# Altium PCB TC-temp-logger-base.PcbDoc (part 2 of 5)
Units mil, origin at the board's own origin, x right, y up, seen from the top; angles counter-clockwise.
Board outline 6370.08 x 6889.76 mil, 4 copper layers (Top Layer, Layer 2, Layer 1, Bottom Layer), stack 61.581 mil thick; 216 components, 163 nets, 792 pads, 3713 vias.
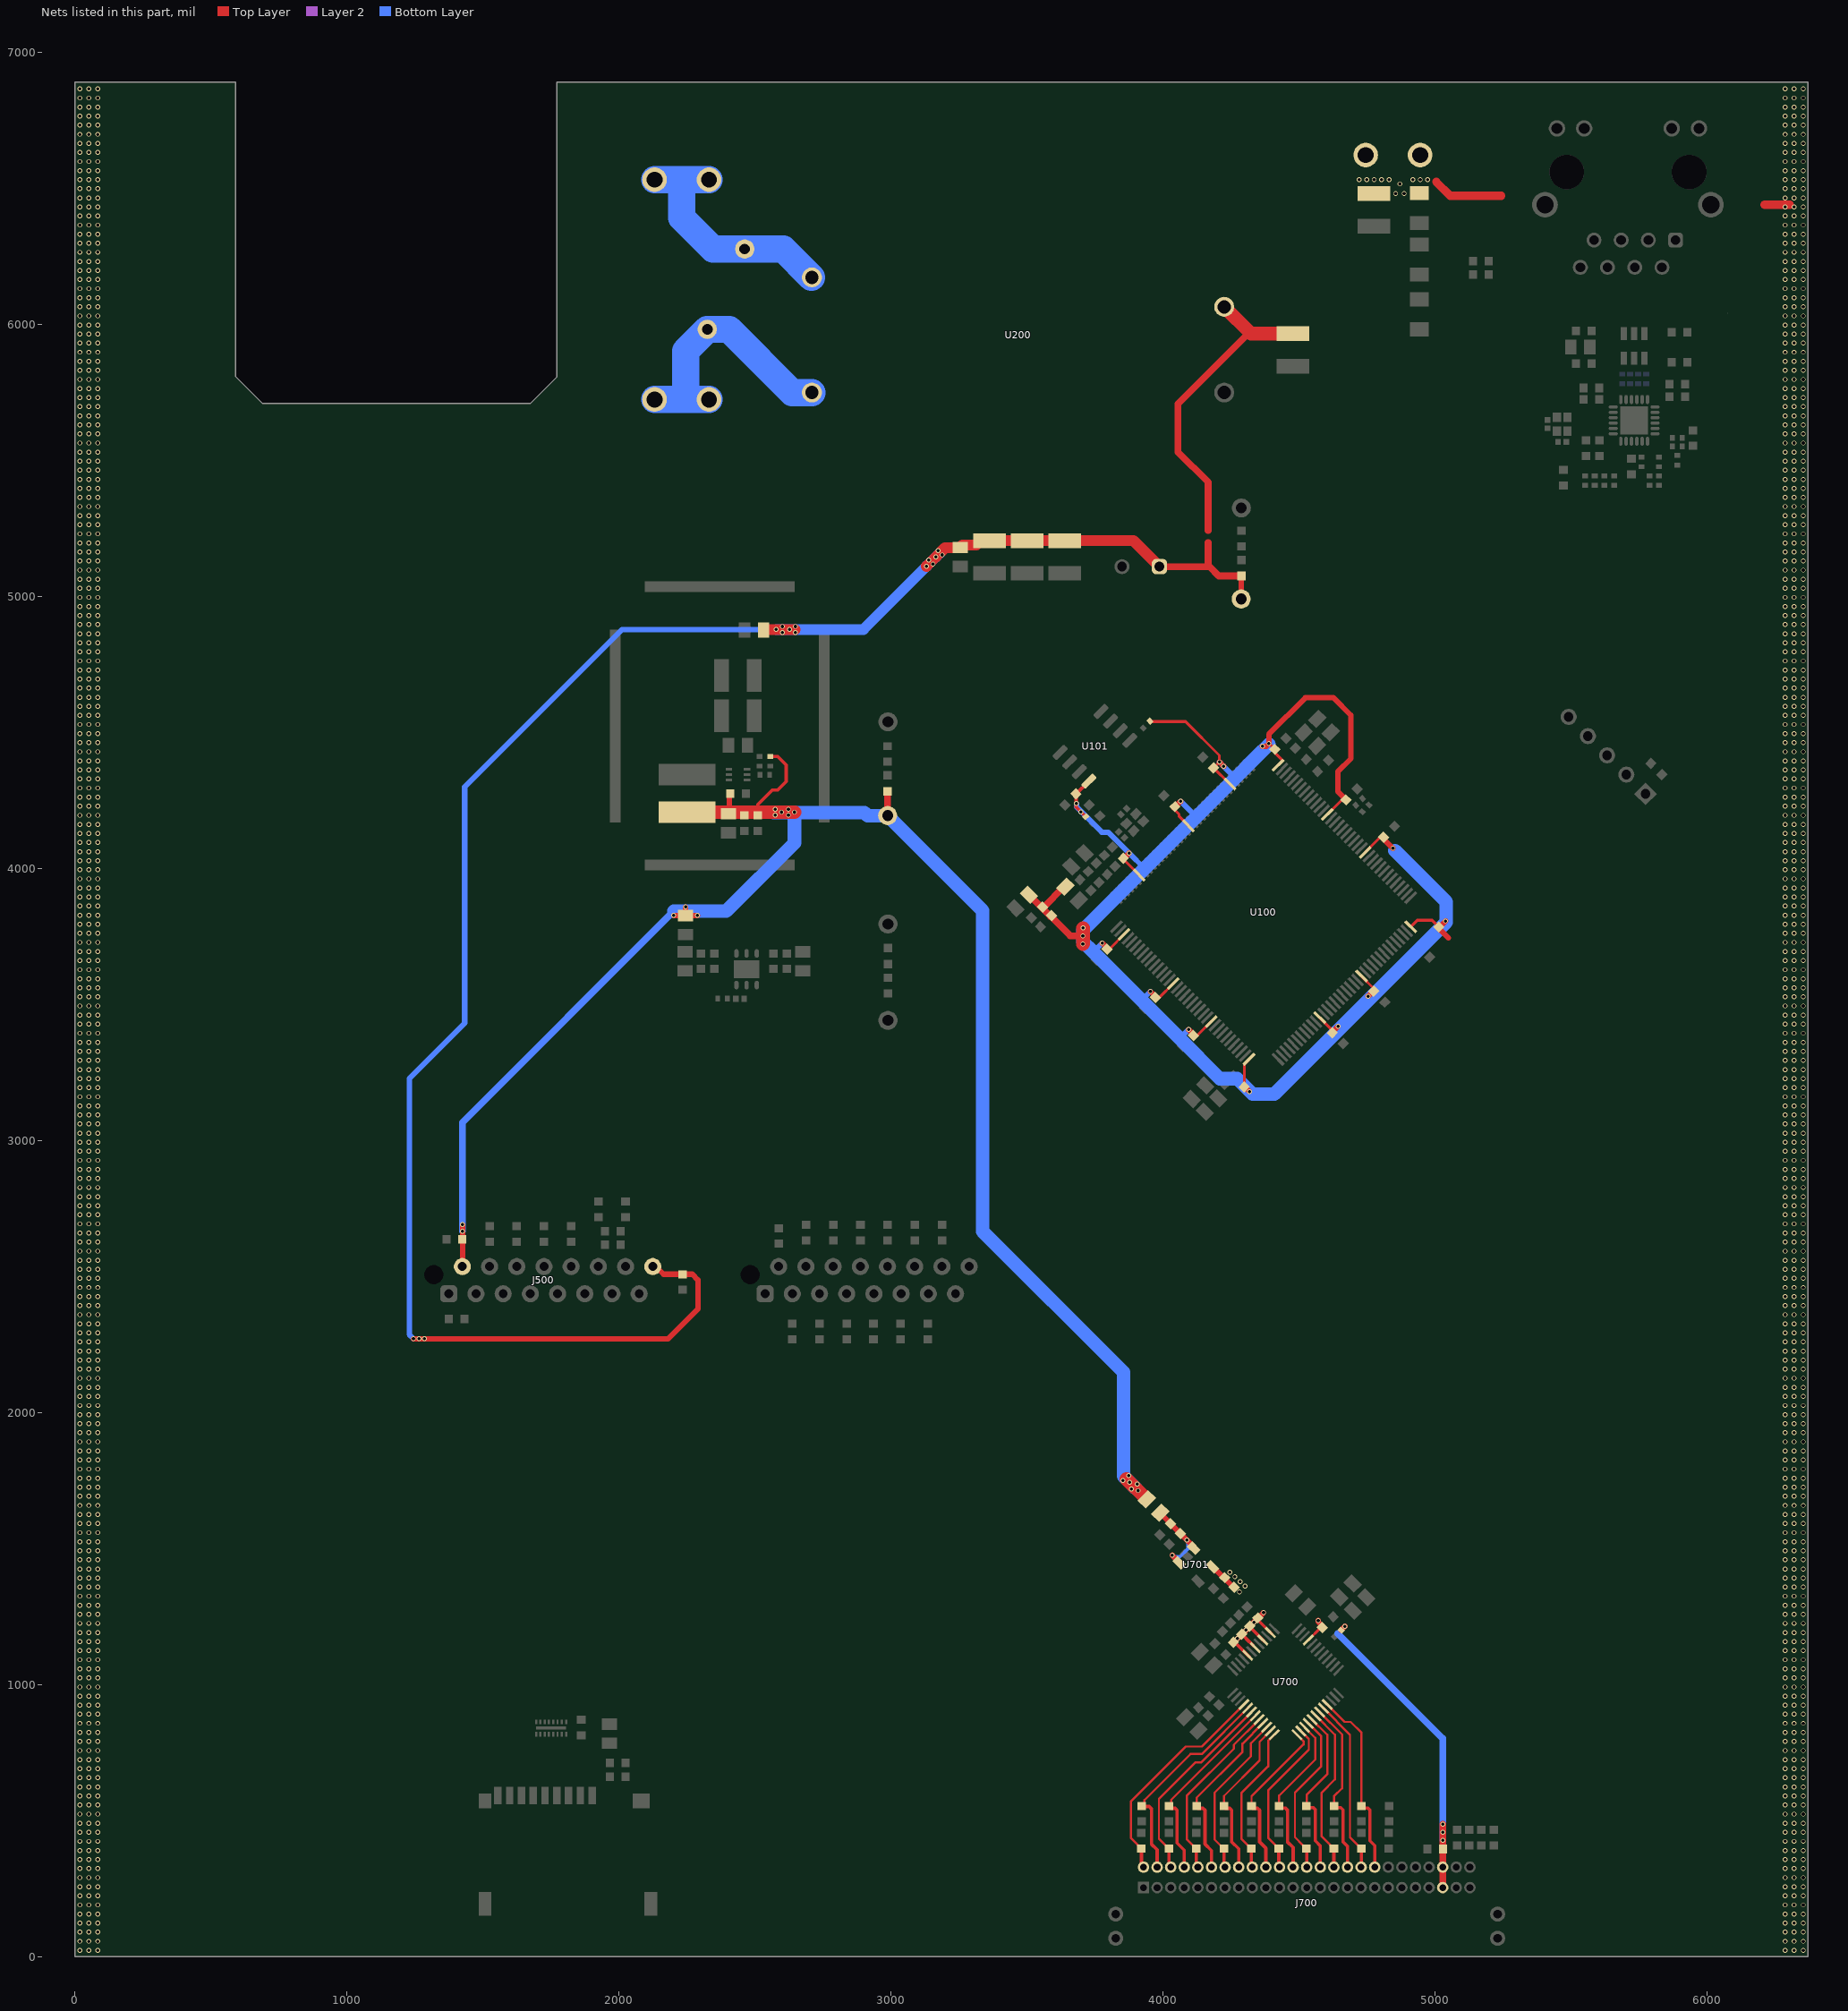
[diagram p4: the nets of this part, all layers, seen from the top]

## Part data
C100 C103 C106 C107 C108 C111 C112 C114 C116 C117 C118 C119 C120 C121 C122 C123 C124 C127 C128 C129 C130 C300 C304 C305 C306 C307 C308 C309 C400 C402 C724 C725 C728 C731 C732 C733 C734: library part C_100nF_50V_X7R_0603_10_AECQ1, "Capacitor", Dielectric=X7R, Manufacturer=Murata, Manufacturer Part Number=GCM188R71H104KA57D, Tolerance (%)=10, Voltage=50V, AEC-Q=1, HelpURL=https://www.murata.com/products/productdetail?partno=GCM188R71H104KA57%23, Part Number=C_100nF_50V_X7R_0603_10_AECQ1, SCH_Footprint=0603, Supplier 1=TME, Supplier 2="RS Components", Supplier 3=Farnell, Supplier 4=Mouser, Supplier 5=Digi-Key, Supplier 6=LCSC, Supplier Part Number 1=GCM188R71H104KA57D, Supplier Part Number 3=4360223, Supplier Part Number 4=81-GCM188R71H104KA7D, Supplier Part Number 5=490-4779-1-ND, Supplier Part Number 6=C85864
C101 C102 C104 C105 C115: library part C_2.2uF_35V_X7S_0805_10_AECQ1, "Capacitor", Dielectric=X7S, Manufacturer=Murata, Manufacturer Part Number=GCM21BC7YA225KE02, Supplier Part Number 1=GCM21BC7YA225KE02L, Tolerance (%)=10, Voltage=35V, AEC-Q=1, HelpURL=https://www.murata.com/products/productdetail?partno=GCM21BC7YA225KE02%23, Part Number=C_2.2uF_35V_X7S_0805_10_AECQ1, SCH_Footprint=0805, Supplier 1=TME, Supplier 2="RS Components", Supplier 3=Farnell, Supplier 4=Mouser, Supplier 5=Digi-Key, Supplier 6=LCSC, Supplier Part Number 3=3784380, Supplier Part Number 4=81-GCM21BC7YA225KE2L, Supplier Part Number 5=490-16390-1-ND, Supplier Part Number 6=C389007
C109 C110 C113 C209 C210 C213 C214 C215 C216 C301 C401 C403 C500 C501 C502 C503 C727 C729 C730 C735 C736: library part C_22uF_10V_X5R_0603_20, "Capacitor", Dielectric=X5R, Manufacturer=Murata, Manufacturer Part Number=GRM188R61A226ME15D, Tolerance (%)=20, Voltage=10V, HelpURL=https://www.mouser.pl/datasheet/2/281/1/GRM188R61A226ME15_02A-1985787.pdf, Part Number=C_22uF_10V_X5R_0603_20, SCH_Footprint=0603, Supplier 1=TME, Supplier 2="RS Components", Supplier 3=Farnell, Supplier 4=Mouser, Supplier 5=Digi-Key, Supplier 6=LCSC, Supplier Part Number 1=GRM188R61A226ME15D, Supplier Part Number 3=2426957, Supplier Part Number 4=81-GRM188R61A226ME5D, Supplier Part Number 5=490-10476-1-ND
C125 C126 C310 C311: library part C_5.6pF_50V_C0G_0402_2_AECQ1, "Capacitor", Dielectric=C0G, Manufacturer=Murata, Manufacturer Part Number=GCM1555C1H5R6BA16D, Tolerance (%)=2, Voltage=50V, AEC-Q=1, HelpURL=https://www.murata.com/products/productdetail?partno=GCM1555C1H5R6BA16%23, Part Number=C_5.6pF_50V_C0G_0402_2_AECQ1, SCH_Footprint=0402, Supplier 1=TME, Supplier 2="RS Components", Supplier 3=Farnell, Supplier 4=Mouser, Supplier 5=Digi-Key, Supplier 6=LCSC, Supplier Part Number 1=GCM1555C1H5R6BA16D, Supplier Part Number 3=3581200, Supplier Part Number 4=81-GCM1555C1H5R6BA6D, Supplier Part Number 5=490-14424-1-ND, Supplier Part Number 6=C415376
C200: library part 860020274017, "WCAP-ATG5 Aluminum Electrolytic Capacitor, Radial, THT, D8 x H20mm, 1500µF, 10V", Capacitance Tolerance=+/-20%, Leakage Current=150µA, Manufacturer="Wurth Elektronik", Operating Temperature Max=105°C, Operating Temperature Min=-40°C, Rated Voltage (DC)=10V, Ripple Current=715mA, Capacitance=1500µF, Category="Aluminum Electrolytic Capacitors", ComponentLink1Description="Website Link", ComponentLink1URL=https://www.we-online.com/redexpert/article/860020274017?ad, ComponentLink2Description="Datasheet Link", ComponentLink2URL=https://www.we-online.com/redexpert/spec/860020274017?ad, Diameter=8mm, Dissipation Factor=17%, Endurance=2000h, Height=20mm, Manufacturer Part Number=860020274017, Match Code=WCAP-ATG5, Mount="Through Hole", Packaging="Ammo Pack", Technical Reference=ATDE200152M010DSPA7B000
C201 C206 C211 C212 C217: library part C_GENERIC_0805, "Capacitor", Tolerance (%)=0, Voltage=0V, Dielectric=-, HelpURL=-, Manufacturer=-, Manufacturer Part Number=-, Part Number=C_GENERIC_0805, SCH_Footprint=0805, Supplier 1=TME, Supplier 2="RS Components", Supplier 3=Farnell, Supplier 4=Mouser, Supplier 5=Digi-Key, Supplier 6=LCSC
C202 C203 C204 C207 C208 C219: library part C_22uF_25V_X7R_1210_20, "Capacitor", Dielectric=X7R, Manufacturer=Murata, Manufacturer Part Number=GRM32ER71E226ME15L, Tolerance (%)=20, Voltage=25V, HelpURL=https://www.murata.com/en-eu/api/pdfdownloadapi?cate=luCeramicCapacitorsSMD&partno=GRM32ER71E226ME15%23, Part Number=C_22uF_25V_X7R_1210_20, SCH_Footprint=1210, Supplier 1=TME, Supplier 2="RS Components", Supplier 3=Farnell, Supplier 4=Mouser, Supplier 5=Digi-Key, Supplier 6=LCSC, Supplier 7="Arrow Electronics", Supplier Part Number 2=8467372P, Supplier Part Number 3=2218912, Supplier Part Number 4=81-GRM32ER71E226ME5L, Supplier Part Number 5=490-10758-1-ND, Supplier Part Number 7=GRM32ER71E226ME15L
C205: library part C_100nF_100V_X7R_0603_10, "Capacitor", Dielectric=X7R, Manufacturer=Kemet, Manufacturer Part Number=C0603X104K1RACTU, Tolerance (%)=10, Voltage=100V, HelpURL=https://www.mouser.pl/datasheet/2/447/KEM_C1013_X7R_FT_CAP_SMD-3316633.pdf, Part Number=C_100nF_100V_X7R_0603_10, SCH_Footprint=0603, Supplier 1=TME, Supplier 2="RS Components", Supplier 3=Farnell, Supplier 4=Mouser, Supplier 5=Digi-Key, Supplier 6=LCSC, Supplier Part Number 3=4380077, Supplier Part Number 4=80-C0603X104K1RACTU, Supplier Part Number 5=399-C0603X104K1RACTUCT-ND
C218: library part C_100nF_10V_X7R_0402_10, "Capacitor", Dielectric=X7R, Manufacturer=Murata, Manufacturer Part Number=GRM155R71A104KA01D, Tolerance (%)=10, Voltage=10V, HelpURL=https://octopart.com/datasheet/grm155r71a104ka01d-murata-6810561, Part Number=C_100nF_10V_X7R_0402_10, SCH_Footprint=0402, Supplier 1=TME, Supplier 2="RS Components", Supplier 3=Farnell, Supplier 4=Mouser, Supplier 5=Digi-Key, Supplier 6=LCSC, Supplier Part Number 1=GRM155R71A104KA01D, Supplier Part Number 3=1828860, Supplier Part Number 4=81-GRM155R71A104KA1D, Supplier Part Number 5=490-6321-1-ND
C302: library part C_470pF_25V_C0G_0603_5, "Capacitor", Dielectric=C0G, Manufacturer="Wurth Elektronik", Manufacturer Part Number=885012006042, Tolerance (%)=5, Voltage=25V, HelpURL=https://www.we-online.com/components/products/datasheet/885012006042.pdf, Part Number=C_470pF_25V_C0G_0603_5, SCH_Footprint=0603, Supplier 1=TME, Supplier 2="RS Components", Supplier 3=Farnell, Supplier 4=Mouser, Supplier 5=Digi-Key, Supplier 6=LCSC, Supplier Part Number 3=2533843, Supplier Part Number 4=710-885012006042, Supplier Part Number 5=732-7784-1-ND
C303: library part C_1uF_16V_X7R_0603_10, "Capacitor", Dielectric=X7R, Manufacturer="Wurth Elektronik", Manufacturer Part Number=885012206052, Tolerance (%)=10, Voltage=16V, HelpURL=https://www.we-online.com/components/products/datasheet/885012206052.pdf, Part Number=C_1uF_16V_X7R_0603_10, SCH_Footprint=0603, Supplier 1=TME, Supplier 2="RS Components", Supplier 3=Farnell, Supplier 4=Mouser, Supplier 5=Digi-Key, Supplier 6=LCSC, Supplier Part Number 2=71070543, Supplier Part Number 3=2495171, Supplier Part Number 4=710-885012206052, Supplier Part Number 5=732-7971-1-ND
C312: library part C_1nF_2kV_X7R_1210_10, "Capacitor", Dielectric=X7R, Manufacturer=AVX, Manufacturer Part Number=1210GC102KAT1A, Tolerance (%)=10, Voltage=2kV, HelpURL=http://www.tme.eu/pl/Document/667fe6e7748c0ed1675574c6bf64b751/AVX_X7R.pdf, Part Number=C_1nF_2kV_X7R_1210_10, SCH_Footprint=1210, Supplier 1=TME, Supplier 2="RS Components", Supplier 3=Farnell, Supplier 4=Mouser, Supplier 5=Digi-Key, Supplier 6=LCSC, Supplier Part Number 1=1210GC102KAT1A
C700 C701 C702 C703 C704 C705 C706 C707 C708 C709 C710 C711 C712 C713 C714 C715 C716 C717 C718 C719: library part C_100pF_100V_C0G_0603_5_AECQ1, "Capacitor", Dielectric=C0G, Manufacturer=Murata, Manufacturer Part Number=GCM1885C2A101JA16D, Tolerance (%)=5, Voltage=100V, AEC-Q=1, HelpURL=https://www.murata.com/products/productdetail?partno=GCM1885C2A101JA16%23, Part Number=C_100pF_100V_C0G_0603_5_AECQ1, SCH_Footprint=0603, Supplier 1=TME, Supplier 2="RS Components", Supplier 3=Farnell, Supplier 4=Mouser, Supplier 5=Digi-Key, Supplier 6=LCSC, Supplier Part Number 1=GCM1885C2A101JA16D, Supplier Part Number 3=2688624, Supplier Part Number 4=81-GCM1885C2A101JA6D, Supplier Part Number 5=490-4771-1-ND, Supplier Part Number 6=C126576
C720 C722 C723 C726: library part C_10uF_16V_X7R_0805_10, "Capacitor", Dielectric=X7R, Manufacturer="Taiyo Yuden", Manufacturer Part Number=EMK212BB7106KG-T, Tolerance (%)=10, Voltage=16V, HelpURL=https://www.mouser.pl/datasheet/2/396/mlcc02_e-1307760.pdf, Part Number=C_10uF_16V_X7R_0805_10, SCH_Footprint=0805, Supplier 1=TME, Supplier 2="RS Components", Supplier 3=Farnell, Supplier 4=Mouser, Supplier 5=Digi-Key, Supplier 6=LCSC, Supplier Part Number 4=963-EMK212BB7106KG-T, Supplier Part Number 5=587-6139-1-ND
C721: library part C_10uF_10V_X5R_0805_10, "Capacitor", Dielectric=X5R, Manufacturer=Kemet, Manufacturer Part Number=C0805C106K8PACTU, Supplier Part Number 1=C0805C106K8PAC, Tolerance (%)=10, Voltage=10V, HelpURL=https://www.mouser.pl/datasheet/2/447/KEM_C1006_X5R_SMD-3316465.pdf, Part Number=C_10uF_10V_X5R_0805_10, SCH_Footprint=0805, Supplier 1=TME, Supplier 2="RS Components", Supplier 3=Farnell, Supplier 4=Mouser, Supplier 5=Digi-Key, Supplier 6=LCSC, Supplier Part Number 2=8029850, Supplier Part Number 3=1463362, Supplier Part Number 4=80-C0805C106K8P, Supplier Part Number 5=399-C0805C106K8PAC7800CT-ND
CON200 CON202 CON300: library part TP_TERMINAL_1-726388-2, "Terminal", Manufacturer="TE Connectivity", Manufacturer Part Number=1-726388-2, HelpURL=https://datasheet.octopart.com/1-726388-2-TE-Connectivity-datasheet-13534909.pdf, Part Number=TP_TERMINAL_1-726388-2, SCH_Footprint=THT, Supplier 1=TME, Supplier 2="RS Components", Supplier 3=Farnell, Supplier 4=Mouser, Supplier 5=Digi-Key, Supplier 6=LCSC, Supplier Part Number 1=1-726388-2, Supplier Part Number 2=6805772, Supplier Part Number 3=2308760, Supplier Part Number 4=571-1-726388-2, Supplier Part Number 5=1-726388-2-ND
D200 D201 D202: library part OL_G_0603_LTST-C193TGKT-5A, "LED GREEN", Manufacturer=Lite-On, Manufacturer Part Number=LTST-C193TGKT-5A, HelpURL=https://pl.mouser.com/datasheet/2/239/Lite-On-LTST-C193TGKT-5A-1175398.pdf, Part Number=OL_G_0603_LTST-C193TGKT-5A, SCH_Footprint=0603, Supplier 1=TME, Supplier 2="RS Components", Supplier 3=Farnell, Supplier 4=Mouser, Supplier 5=Digi-Key, Supplier 6=LCSC, Supplier Part Number 1=LTST-C193TGKT-5A, Supplier Part Number 2=6921063, Supplier Part Number 4=859-LTSTC193TGKT5A, Supplier Part Number 5=160-1832-1-ND
D300: library part CMP-2000-07370-2, "TVS DIODE 5.25V 17V SOT23-6", Breakdown Voltage=6V, Capacitance=3pF, Clamping Voltage=17V, Manufacturer=STMicroelectronics, Max Junction Temp=+125°C, Package=SOT23-6L, Peak Pulse Power=130W, Temperature="-40°C to +125°C", Temperature Range Low=-40°C, Automotive=No, Category=Diode, ComponentLink2Description=Datasheet, ComponentLink2URL=https://upverter.com/datasheet/23dc4ffb028d868909e80577610284b194f13213.pdf, Device Class L1="Circuit Protection", Device Class L2="ESD and Circuit Protection ICs", Device Class L3=unset, Digikey Description="TVS DIODE 5.25V 17V SOT23-6", Direction=Unidirectional, Height=1.45mm, Interface=USB,Ethernet,Other, Lead Free=Yes, Manufacturer Part Number=USBLC6-4SC6, Mouser Description="USBLC6 Series 4 Line 6 V Uni / Bi-Directional ESD Protection - SOT-23-6", Number Of Channels=4, Octopart=https://octopart.com/usblc6-4sc6-stmicroelectronics-347147, RoHS=TRUE, Standoff Height=0mm, Temperature Range High=+125°C
FB100 FB101 FB200 FB201 FB300 FB400 FB700: library part FB_2508051107Y0, "Ferrite Bead", Current=300mA, Manufacturer=Fair-Rite, Manufacturer Part Number=2508051107Y0, Resistance=100mR, HelpURL=https://datasheet.octopart.com/2508051107Y0-Fair-Rite-datasheet-834.pdf, Part Number=FB_2508051107Y0, SCH_Footprint=0805, Supplier 1=TME, Supplier 2="RS Components", Supplier 3=Farnell, Supplier 4=Mouser, Supplier 5=Digi-Key, Supplier 6=LCSC, Supplier Part Number 3=1612004, Supplier Part Number 4=623-2508051107Y0, Supplier Part Number 5=1934-1397-1-ND
FL400: library part CMP-12221-000004-1, "FILTER RC(PI) 45 OHM/20PF SMD", Breakdown Voltage=8V, Capacitance=20pF, Case/Package=QFN, Max Operating Temperature=85°C, Min Operating Temperature=-30°C, Package Quantity=1, Contact Plating=Gold, Depth=1.25mm, ESD Protection=Yes, Height=0.022inch, Lead Free="Lead Free", Length=3.55mm, Max Breakdown Voltage=8V, Mount="Surface Mount", Number Of Channels=6, Number of Pins=16, Packaging="Tape and Reel", Radiation Hardening=No, REACH SVHC="No SVHC", Termination=Flat, Width=0.047inch
J500 J501: library part J_Micro-Match_2x8_THT, "Pin Header", Manufacturer="TE Connectivity", Manufacturer Part Number=1-215079-6, Supplier Part Number 1=AMP-8-215079-6, HelpURL=https://datasheet.octopart.com/1-215079-6-TE-Connectivity-datasheet-11077960.pdf, Part Number=J_Micro-Match_2x8_THT, SCH_Footprint="2x8 1.27mm", Supplier 1=TME, Supplier 2="RS Components", Supplier 3=Farnell, Supplier 4=Mouser, Supplier 5=Digi-Key, Supplier 6=LCSC, Supplier Part Number 2=6804980, Supplier Part Number 3=1772986, Supplier Part Number 4=571-1-215079-6, Supplier Part Number 5=A110872CT-ND
J700: Package=None, Availability=Unavailable, MF=Samtec, MP=TFM-125-01-X-D-RE1-WT, Price=None
JP100 JP200 JP300 JP301 JP302 JP303: library part JP_0603_1608, Manufacturer=-, HelpURL=-, Manufacturer Part Number=-, Part Number=JP_0603_1608, SCH_Footprint=0603, Supplier 1=TME, Supplier 2="RS Components", Supplier 3=Farnell, Supplier 4=Mouser, Supplier 5=Digi-Key, Supplier 6=LCSC
L200: library part 74408942033, "WE-SPC SMT Power Inductor, size 4828, 3.3µH, 2.1A, 0.057Ω", Case/Size Code=4828, DC Resistance=0.0483Ω, DC Resistance Max=0.057Ω, Inductance=3.3µH, Manufacturer="Wurth Elektronik", Operating Temperature Max=125°C, Operating Temperature Min=-40°C, Rated Current=2.1A, Saturation Current=3.5A, Self Resonant Frequency=44MHz, Category="Shielded Power Inductors", ComponentLink1Description="Website Link", ComponentLink1URL=https://www.we-online.com/redexpert/article/74408942033?ad, ComponentLink2Description="Datasheet Link", ComponentLink2URL=https://www.we-online.com/redexpert/spec/74408942033?ad, Height=2.8mm, Length=4.8mm, Manufacturer Part Number=74408942033, Match Code=WE-SPC, Mount="Surface Mount", Packaging="Tape and Reel", Width=4.8mm
MOV200: library part MOV_385VDC_300VAC_THT, "Varistor", Manufacturer=Epcos, Manufacturer Part Number=B72214P2301K103, Voltage=385VDC/300VAC, HelpURL=https://product.tdk.com/en/system/files?file=dam/doc/product/protection/voltage/lead-disk-varistor/data_sheet/70/db/var/siov_leaded_advanced_mp_s14_compact_series.pdf, Part Number=MOV_385VDC_300VAC_THT, SCH_Footprint=7.5x3.5_THT, Supplier 1=TME, Supplier 2="RS Components", Supplier 3=Farnell, Supplier 4=Mouser, Supplier 5=Digi-Key, Supplier 6=LCSC, Supplier Part Number 3=3359824, Supplier Part Number 4=871-B72214P2301K103, Supplier Part Number 5=495-B72214P2301K103-ND
MP200: "WE-SHC Shielding Cabinet, SMT Frame Seamless, Tin Plated, Tray, 26.3x19.8x8.1mm", Manufacturer="Wurth Elektronik", Operating Temperature Max=125°C, Operating Temperature Min=-40°C, Base Material=Steel, Category="EMC Shielding", ComponentLink1Description="Website Link", ComponentLink1URL=https://www.we-online.com/redexpert/article/36702638?ad, ComponentLink2Description="Datasheet Link", ComponentLink2URL=https://www.we-online.com/redexpert/spec/36702638?ad, Height=8.1mm, Length=26.3mm, Manufacturer Part Number=36702638, Match Code=WE-SHC, Mount="Surface Mount", Packaging=Tray, Plating="Tin Plated", Type="SMT Frame Seamless", Width=19.8mm
P100: library part P_HEADER_1x5_2.54, "Pin Header", Manufacturer=Connfly, Manufacturer Part Number=DS1021-1*5SF1-1, Supplier Part Number 1=ZL201-05G, HelpURL=http://datasheet.octopart.com/DS1021-1%2A5SF1-1-Connfly-datasheet-65537859.pdf, Part Number=P_HEADER_1x5_2.54, SCH_Footprint="1x7 2.54mm", Supplier 1=TME, Supplier 2="RS Components", Supplier 3=Farnell, Supplier 4=Mouser, Supplier 5=Digi-Key, Supplier 6=LCSC
R100 R103 R700: library part R_100k_0402_1, Manufacturer=Yageo, Manufacturer Part Number=RC0402FR-07100KL, Power=63mW, Supplier Part Number 1=RC0402FR-07100K, Tolerance=1%, Voltage=50V, HelpURL=http://www.tme.eu/pl/Document/1a2bc76e2be68b3b1670068306778ce6/rc0402yageo.pdf, Part Number=R_100k_0402_1, SCH_Footprint=0402, Supplier 1=TME, Supplier 2="RS Components", Supplier 3=Farnell, Supplier 4=Mouser, Supplier 5=Digi-Key, Supplier 6=LCSC, Supplier Part Number 3=2131798, Supplier Part Number 4=603-RC0402FR-07100KL, Supplier Part Number 5=311-100KLRCT-ND
R101: library part R_47k_0603_1_AECQ0, Manufacturer=Panasonic, Manufacturer Part Number=ERJ-3EKF4702V, Power=100mW, Supplier Part Number 1=ERJ3EKF4702V, Tolerance=1%, Voltage=75V, AEC-Q=0, HelpURL=https://industrial.panasonic.com/cdbs/www-data/pdf/RDA0000/AOA0000C304.pdf, Part Number=R_47k_0603_1_AECQ0, SCH_Footprint=0603, Supplier 1=TME, Supplier 2="RS Components", Supplier 3=Farnell, Supplier 4=Mouser, Supplier 5=Digi-Key, Supplier 6=LCSC, Supplier Part Number 3=2303213, Supplier Part Number 4=667-ERJ-3EKF4702V, Supplier Part Number 5=P47.0KHCT-ND
R102: library part R_47R_0603_1, Manufacturer=Yageo, Manufacturer Part Number=RC0603FR-0747RL, Power=100mW, Tolerance=1%, Voltage=75V, HelpURL=https://datasheet.octopart.com/RC0603FR-0747RL-Yageo-datasheet-8328172.pdf, Part Number=R_47R_0603_1, SCH_Footprint=0603, Supplier 1=TME, Supplier 2="RS Components", Supplier 3=Farnell, Supplier 4=Mouser, Supplier 5=Digi-Key, Supplier 6=LCSC, Supplier Part Number 2=1995582, Supplier Part Number 3=9238328, Supplier Part Number 4=603-RC0603FR-0747RL, Supplier Part Number 5=311-47.0HRCT-ND, Supplier Part Number 6=C114623
R104 R105 R304 R305 R306 R307: library part R_33R_0402_1_AECQ0, Manufacturer=Panasonic, Manufacturer Part Number=ERJ-2RKF33R0X, Power=100mW, Supplier Part Number 1=ERJ2RKF33R0X, Tolerance=1%, Voltage=50V, AEC-Q=0, HelpURL=https://industrial.panasonic.com/cdbs/www-data/pdf/RDA0000/AOA0000C304.pdf, Part Number=R_33R_0402_1_AECQ0, SCH_Footprint=0402, Supplier 1=TME, Supplier 2="RS Components", Supplier 3=Farnell, Supplier 4=Mouser, Supplier 5=Digi-Key, Supplier 6=LCSC, Supplier Part Number 3=2302472, Supplier Part Number 4=667-ERJ-2RKF33R0X, Supplier Part Number 5=P33.0LCT-ND, Supplier Part Number 6=C278594
R200 R201 R202: library part R_1k_0603_1_AECQ0, Manufacturer=Panasonic, Manufacturer Part Number=ERJ-3EKF1001V, Power=100mW, Supplier Part Number 1=ERJ3EKF1001V, Tolerance=1%, Voltage=75V, AEC-Q=0, HelpURL=https://industrial.panasonic.com/cdbs/www-data/pdf/RDA0000/AOA0000C304.pdf, Part Number=R_1k_0603_1_AECQ0, SCH_Footprint=0603, Supplier 1=TME, Supplier 2="RS Components", Supplier 3=Farnell, Supplier 4=Mouser, Supplier 5=Digi-Key, Supplier 6=LCSC, Supplier Part Number 3=2303145, Supplier Part Number 4=667-ERJ-3EKF1001V, Supplier Part Number 5=P1.00KHCT-ND
R203 R205 R206 R308 R309 R310 R311 R314 R317: library part R_10k_0402_1, Manufacturer=Yageo, Manufacturer Part Number=RC0402FR-0710KL, Power=63mW, Supplier Part Number 1=RC0402FR-0710K, Tolerance=1%, Voltage=50V, HelpURL=http://www.tme.eu/pl/Document/1a2bc76e2be68b3b1670068306778ce6/rc0402yageo.pdf, Part Number=R_10k_0402_1, SCH_Footprint=0402, Supplier 1=TME, Supplier 2="RS Components", Supplier 3=Farnell, Supplier 4=Mouser, Supplier 5=Digi-Key, Supplier 6=LCSC
R204: library part R_36k_0402_1_AECQ0, Manufacturer=Panasonic, Manufacturer Part Number=ERJ-2RKF3602X, Power=100mW, Supplier Part Number 1=ERJ2RKF3602X, Tolerance=1%, Voltage=50V, AEC-Q=0, HelpURL=https://industrial.panasonic.com/cdbs/www-data/pdf/RDA0000/AOA0000C304.pdf, Part Number=R_36k_0402_1_AECQ0, SCH_Footprint=0402, Supplier 1=TME, Supplier 2="RS Components", Supplier 3=Farnell, Supplier 4=Mouser, Supplier 5=Digi-Key, Supplier 6=LCSC, Supplier Part Number 3=2302794, Supplier Part Number 4=667-ERJ-2RKF3602X, Supplier Part Number 5=P36.0KLCT-ND, Supplier Part Number 6=C409031
R300 R301 R302 R303: library part R_51R_0402_1_AECQ0, Manufacturer=Panasonic, Manufacturer Part Number=ERJ-2RKF51R0X, Power=100mW, Supplier Part Number 1=ERJ2RKF51R0X, Tolerance=1%, Voltage=50V, AEC-Q=0, HelpURL=https://industrial.panasonic.com/cdbs/www-data/pdf/RDA0000/AOA0000C304.pdf, Part Number=R_51R_0402_1_AECQ0, SCH_Footprint=0402, Supplier 1=TME, Supplier 2="RS Components", Supplier 3=Farnell, Supplier 4=Mouser, Supplier 5=Digi-Key, Supplier 6=LCSC, Supplier Part Number 3=2302492, Supplier Part Number 4=667-ERJ-2RKF51R0X, Supplier Part Number 5=P51.0LCT-ND
R312 R313: library part R_470R_0603_1, Manufacturer=Yageo, Manufacturer Part Number=RC0603FR-07470RL, Power=100mW, Supplier Part Number 1=RC0603FR-07470R, Tolerance=1%, Voltage=50V, HelpURL=http://www.tme.eu/en/Document/9fef8ccbb584e9f6a1c931cf356afd5c/PYu-RC0603_51_RoHS_L_4.pdf, Part Number=R_470R_0603_1, SCH_Footprint=0603, Supplier 1=TME, Supplier 2="RS Components", Supplier 3=Farnell, Supplier 4=Mouser, Supplier 5=Digi-Key, Supplier 6=LCSC, Supplier Part Number 3=9238441, Supplier Part Number 4=603-RC0603FR-07470RL, Supplier Part Number 5=311-470HRCT-ND
R315: library part R_1.5k_0402_1_AECQ0, Manufacturer=Panasonic, Manufacturer Part Number=ERJ-2RKF1501X, Power=100mW, Supplier Part Number 1=ERJ2RKF1501X, Tolerance=1%, Voltage=50V, AEC-Q=0, HelpURL=https://industrial.panasonic.com/cdbs/www-data/pdf/RDA0000/AOA0000C304.pdf, Part Number=R_1.5k_0402_1_AECQ0, SCH_Footprint=0402, Supplier 1=TME, Supplier 2="RS Components", Supplier 3=Farnell, Supplier 4=Mouser, Supplier 5=Digi-Key, Supplier 6=LCSC, Supplier Part Number 3=2302656, Supplier Part Number 4=667-ERJ-2RKF1501X, Supplier Part Number 5=P1.50KLCT-ND
R316: library part R_2.2k_0603_1, Manufacturer=Yageo, Manufacturer Part Number=RC0603FR-072K2L, Power=100mW, Supplier Part Number 1=RC0603FR-072K2, Tolerance=1%, Voltage=50V, HelpURL=https://datasheet.octopart.com/RC0603FR-072K2L-Yageo-datasheet-8328172.pdf, Part Number=R_2.2k_0603_1, SCH_Footprint=0603, Supplier 1=TME, Supplier 2="RS Components", Supplier 3=Farnell, Supplier 4=Mouser, Supplier 5=Digi-Key, Supplier 6=LCSC, Supplier Part Number 3=9238522, Supplier Part Number 4=603-RC0603FR-072K2L, Supplier Part Number 5=311-2.20KHRCT-ND
R318: library part R_12k_0603_1, Manufacturer=Yageo, Manufacturer Part Number=RC0603FR-0712KL, Power=100mW, Supplier Part Number 1=RC0603FR-0712K, Tolerance=1%, Voltage=50V, HelpURL=http://www.tme.eu/pl/Document/d2a72e545e5c8eb7bf2a04fa97535928/rc0603yageo.pdf, Part Number=R_12k_0603_1, SCH_Footprint=0603, Supplier 1=TME, Supplier 2="RS Components", Supplier 3=Farnell, Supplier 4=Mouser, Supplier 5=Digi-Key, Supplier 6=LCSC, Supplier Part Number 3=2693657, Supplier Part Number 4=603-RC0603FR-0712KL, Supplier Part Number 5=311-12.0KHRCT-ND
R319 R320 R321: library part R_330k_1206_1, Manufacturer=Yageo, Manufacturer Part Number=RC1206FR-07330KL, Power=250mW, Tolerance=1%, Voltage=200V, HelpURL=https://datasheet.octopart.com/RC1206FR-07330KL-Yageo-datasheet-8359522.pdf, Part Number=R_330k_1206_1, SCH_Footprint=1206, Supplier 1=TME, Supplier 2="RS Components", Supplier 3=Farnell, Supplier 4=Mouser, Supplier 5=Digi-Key, Supplier 6=LCSC, Supplier Part Number 1=RC1206FR-07330KL, Supplier Part Number 2=1995833, Supplier Part Number 3=9241094, Supplier Part Number 4=603-RC1206FR-07330KL, Supplier Part Number 5=311-330KFRCT-ND
R500 R501: library part R_4.7k_0603_1, Manufacturer=Yageo, Manufacturer Part Number=RC0603FR-074K7L, Power=100mW, Supplier Part Number 1=RC0603FR-074K7, Tolerance=1%, Voltage=75V, HelpURL=http://www.farnell.com/datasheets/2167052.pdf?_ga=2.156163131.1690599162.1548417389-1379097396.1542296996&_gac=1.18389067.1547230258.Cj0KCQiAmuHhBRD0ARIsAFWyPwhX8HcvXnM3tA0ZBodZLzDIjH2ZxLpjT5LWo9bad_HPRbU8LfPq44UaAhEwEALw_wcB, Part Number=R_4.7k_0603_1, SCH_Footprint=0603, Supplier 1=TME, Supplier 2="RS Components", Supplier 3=Farnell, Supplier 4=Mouser, Supplier 5=Digi-Key, Supplier 6=LCSC, Supplier Part Number 3=9238565, Supplier Part Number 4=603-RC0603FR-074K7L, Supplier Part Number 5=311-4.70KHRCT-ND
R502 R503 R504 R505 R506 R507 R508 R509 R510 R511 R512 R513 R514 R515 R516 R517 R518 R519 R702 R703 R704 R705: library part R_22R_0603_5, Manufacturer=Walsin, Manufacturer Part Number=WF06P220JTL, Power=125mW, Supplier Part Number 1=WF06P-22R-5%, Tolerance=5%, Voltage=50V, HelpURL=http://www.tme.eu/pl/Document/b315665a56acbc42df513c99b390ad98/ROYALOHM-THICKFILM.pdf, Part Number=R_22R_0603_5, SCH_Footprint=0603, Supplier 1=TME, Supplier 2="RS Components", Supplier 3=Farnell, Supplier 4=Mouser, Supplier 5=Digi-Key, Supplier 6=LCSC
R701: library part R_1R_0603_1, Manufacturer=Yageo, Manufacturer Part Number=RC0603FR-071RL, Power=100mW, Supplier Part Number 1=RC0603FR-071R, Tolerance=1%, Voltage=50V, HelpURL=http://www.tme.eu/en/Document/9fef8ccbb584e9f6a1c931cf356afd5c/PYu-RC0603_51_RoHS_L_4.pdf, Part Number=R_1R_0603_1, SCH_Footprint=0603, Supplier 1=TME, Supplier 2="RS Components", Supplier 3=Farnell, Supplier 4=Mouser, Supplier 5=Digi-Key, Supplier 6=LCSC, Supplier Part Number 3=9238123, Supplier Part Number 4=603-RC0603FR-071RL, Supplier Part Number 5=311-1.00HRCT-ND
T300: "WE-RJ45 LAN Transformer, THT, 10/100 Base-T, Tab Down, 1 Port", Manufacturer="Wurth Elektronik", Max Operating Temperature=85°C, Min Operating Temperature=-40°C, Category="Filtered Connectors", ComponentLink1Description="Website Link", ComponentLink1URL=https://www.we-online.com/redexpert/article/7499011121A?ad, ComponentLink2Description="Datasheet Link", ComponentLink2URL=https://www.we-online.com/redexpert/spec/7499011121A?ad, Data Rate="10/100 Base-T", Height=13.74mm, LED=yellow-green, Length=21.84mm, Manufacturer Part Number=7499011121A, Match Code="WE-RJ45 LAN", Mount="Through Hole", Number of Ports=1, Packaging=Tube, PoE=non-PoE, Shield Tabs=Yes, Tab=Down, USB="No USB", Width=15.88mm
TP200 TP202 TP204: library part TP_LOOP_MICRO_RED, "Testpoint", Manufacturer=Keystone, Manufacturer Part Number=5000, HelpURL=https://www.keyelco.com/product.cfm/product_id/1309, Part Number=TP_LOOP_MICRO_RED, SCH_Footprint=THT, Supplier 1=TME, Supplier 2="RS Components", Supplier 3=Farnell, Supplier 4=Mouser, Supplier 5=Digi-Key, Supplier 6=LCSC, Supplier Part Number 3=2250281, Supplier Part Number 4=534-5000, Supplier Part Number 5=36-5000-ND, Supplier Part Number 6=C5199900
TP201 TP203 TP205: library part TP_LOOP_MICRO_BLACK, "Testpoint", Manufacturer=Keystone, Manufacturer Part Number=5001, HelpURL=https://www.keyelco.com/product.cfm/product_id/1310, Part Number=TP_LOOP_MICRO_BLACK, SCH_Footprint=THT, Supplier 1=TME, Supplier 2="RS Components", Supplier 3=Farnell, Supplier 4=Mouser, Supplier 5=Digi-Key, Supplier 6=LCSC, Supplier Part Number 3=2301278, Supplier Part Number 4=534-5001, Supplier Part Number 5=36-5001-ND, Supplier Part Number 6=C238122
U100: "ARMÂ® CortexÂ®-M33 STM32H5 Microcontroller IC 32-Bit 250MHz 2MB (2M x 8) FLASH 144-LQFP (20x20)", Package="LQFP-144 STMicroelectronics", Check_prices=https://www.snapeda.com/parts/STM32H563ZIT6/STMicroelectronics/view-part/?ref=eda, MF=STMicroelectronics, MP=STM32H563ZIT6, SnapEDA_Link=https://www.snapeda.com/parts/STM32H563ZIT6/STMicroelectronics/view-part/?ref=snap
U101: library part MX25L25645GM2I-10G, "IC FLSH 256MBIT SPI 120MHZ 8WSON", RoHS Compliant=Yes
U200: "Enclosed AC DC Converters 1 Uitgang 5V 1A 85 ~ 305 VAC, 120 ~ 430 VDC Input", Package="DIP-4 Mean Well", Availability=Unavailable, MF="MEAN WELL", MP=IRM-05-5, Price=None, SnapEDA_Link=https://www.snapeda.com/parts/IRM-05-5/MEAN%20WELL%20USA%20Inc./view-part/364712/?ref=snap
U201: library part AP62200Z6-7, "Description", Manufacturer_Name="Diodes Inc", Copyright="Copyright (C) 2025 Ultra Librarian. All rights reserved.", Manufacturer_Part_Number=AP62200Z6-7, RefDes=RefDes, Type=Type
U202: library part CMP-0244-00293-1, "Very Low Quiescent BiCMOS Voltage Regulator, 3.3V, 6-Pin VFDFPN, Tape and Reel", ComponentLink1Description="Manufacturer URL", ComponentLink1URL=http://www.st.com, ComponentLink2Description=Datasheet, ComponentLink2URL=http://www.st.com/internet/com/TECHNICAL_RESOURCES/TECHNICAL_LITERATURE/DATASHEET/CD00186925.pdf, DatasheetVersion=1/09/2009, PackageDescription="6-Pin Plastic, Dual LLP, 3 x 3 mm Body, 0.95 mm Pitch, Exposed Pad", PackageReference=DFN6D, PackageVersion=2008
U300: library part CMP-06281-000006-2, "IC TRANSCEIVER 1/1 24SQFN", Ambient Temperature Range High=+70°C, Ambient Temperature Range Low=0°C, Manufacturer=Microchip, Max Supply Voltage=3.6V, Min Supply Voltage=1.14V, Nominal Supply Current=6.5-59mA, Package=C04-143B-S4QFN, Temperature="0°C to +70°C", Automotive=No, Category=IC, ComponentLink2Description=Datasheet, ComponentLink2URL=http://ww1.microchip.com/downloads/en/DeviceDoc/DS_LAN8742_00001989A.pdf, Data Rate=100Mbits/s, Device Class L1="Integrated Circuits (ICs)", Device Class L2="Interface ICs", Device Class L3="Ethernet Interface ICs", Digikey Description="IC TRANSCEIVER 1/1 24SQFN", Height=1mm, Interface=Ethernet,Other, Ipc Land Pattern Name=QFN50P400X400X90-24, Lead Free=Yes, Manufacturer Part Number=LAN8742A-CZ-TR, Mouser Description="Small Footprint RMII 10/100 Ethernet Transceiver with flexPWR Technology", Number Of Channels=1, Octopart=https://octopart.com/lan8742a-cz-tr-microchip-29030587, RoHS=TRUE, Simplex Duplex=Full-Duplex, Standoff Height=0mm, Temperature Range High=+70°C, Temperature Range Low=0°C
U700: library part CMP-09104-000007-1, "MULTI SENSOR HIGH ACCURACY DIGIT", Case/Package=LQFP, Max Operating Temperature=125°C, Max Supply Voltage=5.25V, Min Operating Temperature=-40°C, Min Supply Voltage=2.85V, Mount="Surface Mount", Number of Pins=48, Output Type=SPI, Packaging=Tray, REACH SVHC="No SVHC", RoHS Compliant=Yes, Series=-
U701: library part CMP-0786-00394-1, "Ultralow Noise, 150 mA CMOS Linear Regulator, 2.2 to 5.5 V Vin, 3.3 V Vout, Industrial, 5-pin SOT23 (UJ-5), Reel", Manufacturer="Analog Devices", Preset Vout Values (V)=3.3, Supply Current IGND @ Small Load=10uA, Code_JEDEC=MO-193-AB, ComponentLink1Description="Manufacturer URL", ComponentLink1URL=http://www.analog.com/en/index.html, ComponentLink2Description=Datasheet, ComponentLink2URL=http://www.analog.com/static/imported-files/data_sheets/ADP150.pdf, ComponentLink3Description="Package Specification", ComponentLink3URL=http:/www.analog.com/static/imported-files/packages/PKG_PDF/TSOT(UJ)/UJ_5.pdf, ComponentLink4Description="URL Link1", ComponentLink4URL="Product URL:http://www.analog.com/en/ADP150/productSearch.html", DatasheetVersion="Rev. A", Iout max=150mA, Mounting Technology="Surface Mount", PackageDescription="5-Pin Thin Small Outline Transistor Package, Body 2.9 x 1.6 mm, Pitch 0.95 mm", PackageReference=UJ-5, PackageVersion="100708-A, 10/2008", Packing=Reel, PartNumber=ADP150AUJZ-3.3-R7, Vin (max) (V)=5.5, Vin (min) (V)=2.2
X100 X300: library part X_NX2016SA-32M-EXS00A-CS06465, Manufacturer=NDK, Manufacturer Part Number=NX2016SA-25.000M-STD-CZS-1, HelpURL=https://pl.mouser.com/datasheet/2/905/ndk_08142018_NX2016SA-32M-EXS00A-CS06465_SS-1389053.pdf, Part Number=NX2016SA-25.000M-STD-CZS-1, SCH_Footprint=x1.6, Supplier 1=TME, Supplier 2="RS Components", Supplier 3=Farnell, Supplier 4=Mouser, Supplier 5=Digi-Key, Supplier 6=LCSC, Supplier Part Number 4=344-NX2016SA32S06465, Supplier Part Number 5=644-1300-1-ND

## Via types
v1: diameter 17.72, hole 11.81, Top Layer to Bottom Layer, tented both sides, 3702 vias
v2: diameter 23.62, hole 11.81, Top Layer to Bottom Layer, 9 vias
v3: diameter 19.68, hole 7.87, Top Layer to Bottom Layer, tented both sides, 2 vias

## Nets (pads, with @x,y where several pads share a name; then routed paths per layer and width w, separated by ;. In a path a pad name is that pad's centre, name@x,y a point inside that pad or via, vN(x,y) a via of type N, cw(c..) or ccw(c..) an arc to the next point about the centre after c; other vN are vias at no path point)
3V3-LTC: C729.1 C730.1 C731.1 C732.1 C733.1 C734.1 C735.1 C736.1 J700.45 J700.46 R700.1 U700.2 U700.4 U700.6 U700.8 U700.45 U701.5 | length 1832.1
  Top Layer w10: U700.45@4533.52,1163.11 4579.16,1208.75 C736.1@4584.66,1208.75
  Top Layer w12: C732.1@4257.31,1152.69 4265.51,1152.69 U700.8@4314.91,1103.29 ; C733.1@4287.31,1182.69 4291.1,1182.69 4316.85,1156.94 4316.98,1156.94 U700.6@4330.77,1143.15 ; C734.1@4317.31,1212.44 U700.4@4370.19,1159.56 ; C735.1@4347.31,1242.69 4347.31,1238 U700.2@4397.97,1187.34
  Top Layer w20: U701.5@4180.55,1432.34 4183.19,1432.34 4258.33,1357.21 C730.1@4260.98,1357.21 ; C732.1@4257.31,1152.69 4287.31,1182.69 4347.31,1242.69 4348.01,1242.69 v1@4368.11,1262.8 ; v1(4569.88,1235.24) 4569.88,1230.27 4584.66,1215.49 C736.1@4584.66,1208.75 ; R700.1@4654.42,1199.42 4654.42,1199.69 v1(4668.31,1213.58)
  Top Layer w25: J700.45@5027.56,253.15 J700.46@5027.56,328.15 v1(5027.56,427.17) v1(5027.56,456.69) v1(5027.56,486.22)
  Bottom Layer w25: 4641.89,1186.89 5027.56,801.22 v1(5027.56,486.22) v1(5027.56,456.69) v1(5027.56,427.17)
  other v1: 4273.29,1168.68 4304.37,1199.76 4333.29,1228.68 4369.09,1263.78 4280.51,1339.57 4301.18,1361.22 4282.48,1377.95 4263.78,1395.67 4245.08,1412.4
3V3-STM32: C106.1 C109.1 C110.1 C111.1 C116.1 C117.1 C118.1 C119.1 C120.1 C121.1 C122.1 C123.1 C124.1 C127.1 C128.1 C129.1 FB100.2 FB101.2 JP100.2 R100.2 R103.2 U100.6 U100.17 U100.30 U100.39 U100.52 U100.62 U100.72 U100.84 U100.95 U100.108 U100.121 U100.131 U100.144 U101.8 | length 7176
  Top Layer w10: C122.1@3794.1,3703.31 3802.6,3703.31 U100.39@3856.3,3757.02 ; C129.1@3853.48,4037.33 3853.48,4033.48 U100.30@3911.68,3975.28 ; R103.2@3951.62,4540.84 3953.01,4539.44 4082.6,4539.44 4206.69,4415.35 v1(4206.69,4390.75) 4206.69,4389.75 C106.1@4185.54,4368.6 4211.82,4342.31 4213.08,4342.31 U100.6@4246.05,4309.34 ; C120.1@3971.6,3525.81 3972.3,3525.12 3986.1,3525.12 3986.8,3525.81 3987,3525.81 U100.52@4037.26,3576.07 ; C128.1@4036.78,4220.63 4058.63,4198.77 4058.63,4191.33 4058.82,4191.14 4058.82,4190.34 U100.17@4092.93,4156.23 ; C119.1@4111.6,3385.81 4125.39,3385.81 U100.62@4176.45,3436.87 ; C109.1@4297.75,3196.59 4298.44,3197.29 4298.44,3197.83 4298.44,3279.75 4315.64,3296.95 U100.72@4315.64,3297.68 ; v1(4365.16,4448.82) 4366.63,4450.3 4368.72,4450.3 v1@4367.25,4448.82 ; v1@4387.3,4457.18 4385.21,4457.18 4386.69,4458.66 v1(4388.78,4458.66) v1@4389.75,4458.66 ; C124.1@4410.92,4437.49 4410.92,4424.42 4439.11,4396.23 4439.11,4395.5 U100.144@4422.55,4378.94 ; U100.84@4575.66,3450.79 4621.6,3404.86 C118.1@4621.6,3395.81 ; U100.131@4603.5,4197.99 4657.86,4252.35 4671.74,4252.35 C121.1@4672.44,4251.65 ; U100.95@4728.77,3603.91 4774.1,3558.58 C117.1@4774.1,3548.31 ; U100.121@4742.69,4058.79 4798.05,4114.15 C123.1@4809.94,4114.15 ; U100.108@4909.73,3784.86 4933.92,3809.06 4988.72,3809.06 C127.1@5013.31,3784.46
  Top Layer w12: R100.2@3715.01,4190.12 v1(3697.49,4207.64) 3679.97,4225.15 3679.97,4272.8 C116.1@3679.28,4273.49 3679.81,4273.49 3726.43,4320.11 U101.8@3726.96,4320.11 ; v1@4389.75,4458.66 C124.1@4410.92,4437.49
  Top Layer w20: v1(3775.55,3724.61) C122.1@3794.1,3706.06 ; C129.1@3856.22,4037.33 v1(3874.77,4055.87) ; v1(3953.05,3547.11) C120.1@3971.6,3528.56 ; C128.1@4038.85,4222.7 4040.61,4222.7 v1(4063.98,4246.06) ; v1(4093.05,3407.11) C119.1@4111.6,3388.56 ; v1(4206.69,4390.75) v1(4222.44,4375) ; C109.1@4298.44,3197.83 v1(4316.99,3179.28) ; v1(4365.16,4448.82) 4367.25,4448.82 4378.94,4448.82 4387.3,4457.18 v1(4388.78,4458.66) 4388.78,4493.11 4522.64,4626.97 4625.98,4626.97 4689.96,4562.99 4689.96,4403.54 4642.72,4356.3 4642.72,4281.5 4645.67,4278.54 4645.67,4278.42 C121.1@4672.44,4251.65 ; C118.1@4624.34,3400.33 v1(4642.89,3418.88) ; v1(4752.8,3529.76) C117.1@4771.35,3548.31 ; C123.1@4809.94,4114.15 4809.94,4108.37 v1(4844.49,4073.82) ; C127.1@5013.31,3784.46 5013.31,3779.86 JP100.2@5048.48,3744.7 ; C127.1@5019.54,3787.93 v1(5038.09,3806.48)
  Top Layer w25: FB100.2@3506.05,3902.7 3506.48,3902.7 3586.05,3823.14 3586.48,3823.14 3658.63,3750.98 v1(3704.77,3750.98) ; C110.1@3556.48,3858.14 3557.18,3857.44 3560.38,3857.44 3634.97,3932.03 FB101.2@3640.37,3932.03
  Top Layer w50: v1(3704.72,3721.46) 3705.71,3722.44 v1(3705.71,3780.51)
  Layer 2 w20: v1@4386.69,4458.66 v1(4388.78,4458.66)
  Bottom Layer w20: v1(3681.1,4238.19) 3681.1,4226.38 3774.61,4132.87 3797.77,4132.87 v1(3874.77,4055.87) 3931.63,3999.02 3932.09,3999.02 ; 3738.68,3696.36 3747.3,3696.36 v1(3775.55,3724.61) ; 3921.26,3513.78 3921.26,3515.31 v1(3953.05,3547.11) ; 4058.07,3376.97 4062.91,3376.97 v1(4093.05,3407.11) ; v1(4063.98,4246.06) 4121.56,4188.48 ; v1(4206.69,4390.75) v1(4222.44,4375) 4263.78,4333.66 4263.78,4330.71 ; 4346.37,4413.3 4346.37,4416.25
  Bottom Layer w50: v1@4388.78,4455.71 4346.37,4413.3 4263.78,4330.71 3932.09,3999.02 3704.77,3771.69 v1(3704.77,3750.98) 3704.77,3730.27 3738.68,3696.36 3921.26,3513.78 4058.07,3376.97 4208.2,3226.84 4272.17,3226.84 4328.74,3170.28 4408.46,3170.28 5040.35,3802.17 5040.35,3876.78 4852.27,4064.86
3V6: C205.2 C209.1 C210.1 C211.1 C501.1 D201.2 FB201.2 FB700.1 J500.2 L200.2 R204.2 TP202.1 | length 6679.7
  Top Layer w12: C209.1@2509.84,4194.33 2509.84,4206.39 2509.84,4234.25 2562.99,4287.4 2582.68,4287.4 2614.17,4318.9 2614.17,4379.92 2582.98,4411.11 R204.2@2555.13,4411.11
  Top Layer w20: J500.2@1423.6,2536.05 1424.21,2536.67 1424.21,2635.83 v1(1424.21,2689.96) ; v1(2200.79,3826.77) FB201.2@2243.66,3826.77 ; FB201.2@2244.09,3826.34 FB201.2@2243.66,3826.77 ; v1(2244.09,3858.27) 2244.09,3827.2 FB201.2@2243.66,3826.77 ; FB201.2@2244.53,3826.77 v1(2287.4,3826.77) ; C211.1@2401.57,4200.79 2405.03,4204.24 2405.03,4206.39 2405.03,4271.84 C205.2@2408.48,4275.29
  Top Layer w25: TP202.1@2987.06,4194.04 D201.2@2987.06,4282.62
  Top Layer w50: L200.2@2250.01,4206.39 2405.03,4206.39 2509.84,4206.39 v1(2596.2,4206.39) v1(2644.61,4206.39) ; 3864.84,1755.23 FB700.1@3935.88,1684.2
  Bottom Layer w25: v1(1424.21,2666.34) 1424.21,3065.94 2192.91,3834.65 2200.79,3842.52
  Bottom Layer w50: 2200.79,3842.52 2393.7,3842.52 2644.61,4093.43 v1@2644.61,4204.72 ; 2566.93,4204.72 v1@2644.61,4204.72 ; v1(2644.61,4206.39) v1@2644.61,4204.72 ; 3898.62,1721.46 v1(3876.48,1743.6) 3854.33,1765.75 3854.33,2147.64 3336.61,2665.35 3336.61,3844.49 2990.89,4190.21 TP202.1@2987.06,4194.04 2985.94,4192.91 2913.39,4192.91 2901.57,4204.72 v1@2644.61,4204.72
  other v1: 3907.48,1712.6 3882.87,1718.5 3904.53,1736.22 3851.87,1749.51 3873.52,1767.22 2573.93,4195.25 2622.34,4195.25 2573.93,4217.52 2622.34,4217.52
3V6-LTC-LDO-VIN_7: C727.1 C728.1 FB700.2 U701.1 U701.3 | length 323.1
  Top Layer w20: FB700.2@3989.32,1630.76 3989.32,1629.82 C728.1@4026.68,1592.45 ; C728.1@4027.63,1590.55 4028.12,1590.55 4062.99,1555.69 C727.1@4062.99,1555.2 v1(4087.67,1530.52) 4112.34,1505.84 U701.1@4112.34,1500.55 ; v1(4033.46,1475.39) 4059.45,1449.41 U701.3@4059.45,1447.66
  Bottom Layer w12: v1(4033.46,1475.39) 4035.01,1475.39 4040.47,1469.93 4062.45,1469.93 4091.45,1498.93 4091.45,1525.19 4087.67,1528.97 v1(4087.67,1530.52)
5V-PS: C200.1 C201.1 C202.1 C203.1 C204.1 C502.1 D200.2 FB200.1 J500.16 JP200.2 TP200.1 | length 7192.2
  Top Layer w20: v1(1243.77,2270.67) 1264.76,2270.67 v1(1284.45,2270.67) 2180.12,2270.67 2289.37,2379.92 2289.37,2487.2 2268.7,2507.87 2163.41,2507.87 2135.23,2536.05 J500.16@2123.6,2536.05 ; TP200.1@4287,4990.55 D200.2@4287,5074.41
  Top Layer w25: C200.1@3986.22,5109.26 4170.27,5109.26 ; JP200.2@4165.35,5197.83 4165.35,5114.17 4170.27,5109.26 ; D200.2@4287.4,5074.8 4204.72,5074.8 4170.27,5109.26
  Top Layer w40: FB200.1@2531.07,4877.68 2647.33,4877.68 ; v1(3129.92,5110.24) v1(3164.15,5144.46) 3198.38,5178.69 3252.93,5178.69 C201.1@3253.93,5179.69 3262.43,5188.19 3312.7,5188.19 3329.2,5204.69 C202.1@3362.2,5204.69 C203.1@3499.99,5204.69 C204.1@3637.79,5204.69 3850.36,5204.69 ; 3850.39,5204.72 3890.75,5204.72 C200.1@3986.22,5109.26 ; TP200.1@4286.61,4990.16 TP200.1@4287,4990.55
  Bottom Layer w20: v1(1284.45,2270.67) 1264.76,2270.67 v1(1243.77,2270.67) 1228.35,2286.09 1228.35,3227.36 1432.09,3431.1 1432.09,4299.21 2010.83,4877.95 v1(2577.58,4877.95)
  Bottom Layer w40: v1(2577.58,4877.95) v1(2625.98,4877.95) 2897.64,4877.95 v1(3129.92,5110.24) v1(3164.15,5144.46) 3181.26,5161.58
  other v1: 1264.11,2270.67 2599.85,4866.82 2648.26,4866.82 2599.85,4889.09 2648.26,4889.09 3153.54,5118.11 3137.8,5133.86 3187.77,5152.34 3172.02,5168.09
5V_DC-PS_3: C219.1 JP200.1 U200.VPOS | length 1180.3
  Top Layer w25: JP200.1@4165.35,5242.13 4165.35,5418.82 4053.66,5530.51 4053.66,5707.21 4311.97,5965.51 4322.87,5965.51
  Top Layer w50: U200.VPOS@4224.41,6063.98 4322.87,5965.51 C219.1@4476.38,5965.51
AC_3_N: CON200.1 MOV200.2 U200.AC/N | length 907.7
  Bottom Layer w100: CON200.1@2130.32,6531.5 2230.32,6531.5 ; CON200.1@2330.32,6531.5 2230.32,6531.5 ; U200.AC/N@2707.31,6172.24 2602.98,6276.57 2345.47,6276.57 2230.32,6391.73 2230.32,6531.5
AC_L_3: CON202.1 MOV200.1 U200.AC/L | length 972
  Bottom Layer w100: CON202.1@2130.32,5723.43 2166.34,5723.43 2244.09,5723.43 ; CON202.1@2330.32,5723.43 2244.09,5723.43 ; U200.AC/L@2708.66,5749.02 2636.81,5749.02 2404.53,5981.3 MOV200.1@2323.82,5981.3 2244.09,5901.57 2244.09,5723.43
AC_PE: C312.1 CON300.1 JP302.2 JP303.2 R319.1 | length 352.1
  Top Layer w30: 5003.94,6523.62 5055.12,6472.44 5242.34,6472.44 ; 6210.65,6439.37 6303.14,6439.37